# Altium PCB 3KW-139_V1.0PCB.PcbDoc (part 1 of 3)
Units mm, origin at the board's own origin, x right, y up, seen from the top; angles counter-clockwise.
Board outline 181.22 x 106.87 mm, 2 copper layers (Top Layer, Bottom Layer); 320 components, 0 nets, 807 pads, 870 vias.
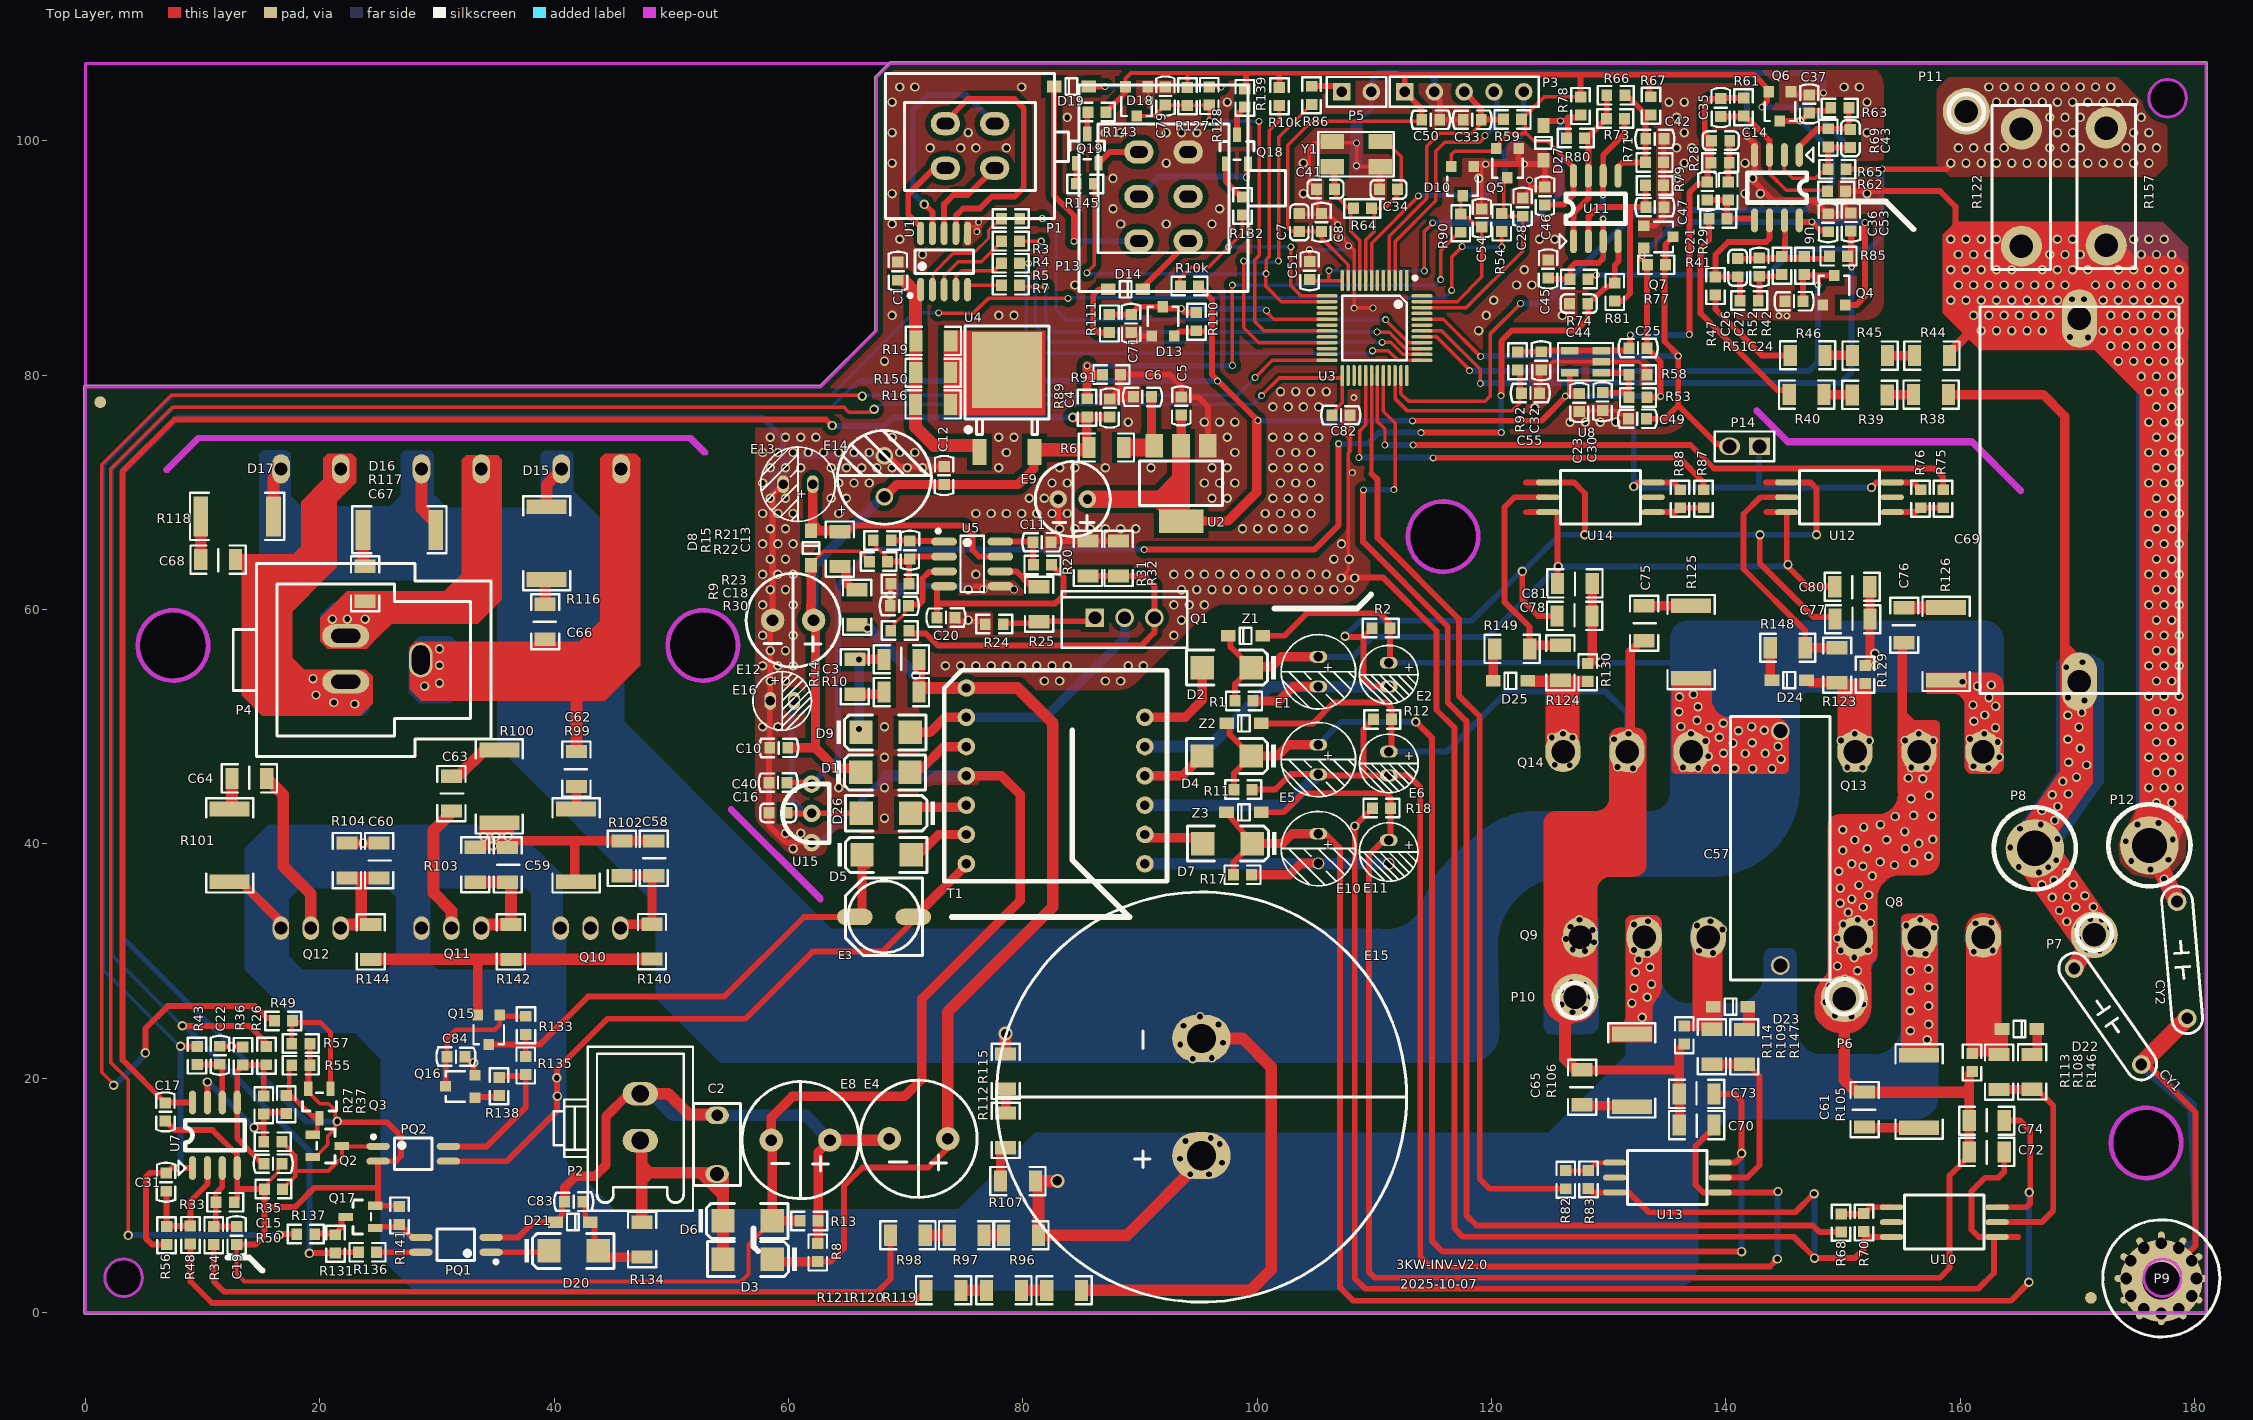
[diagram p0: Top Layer view]
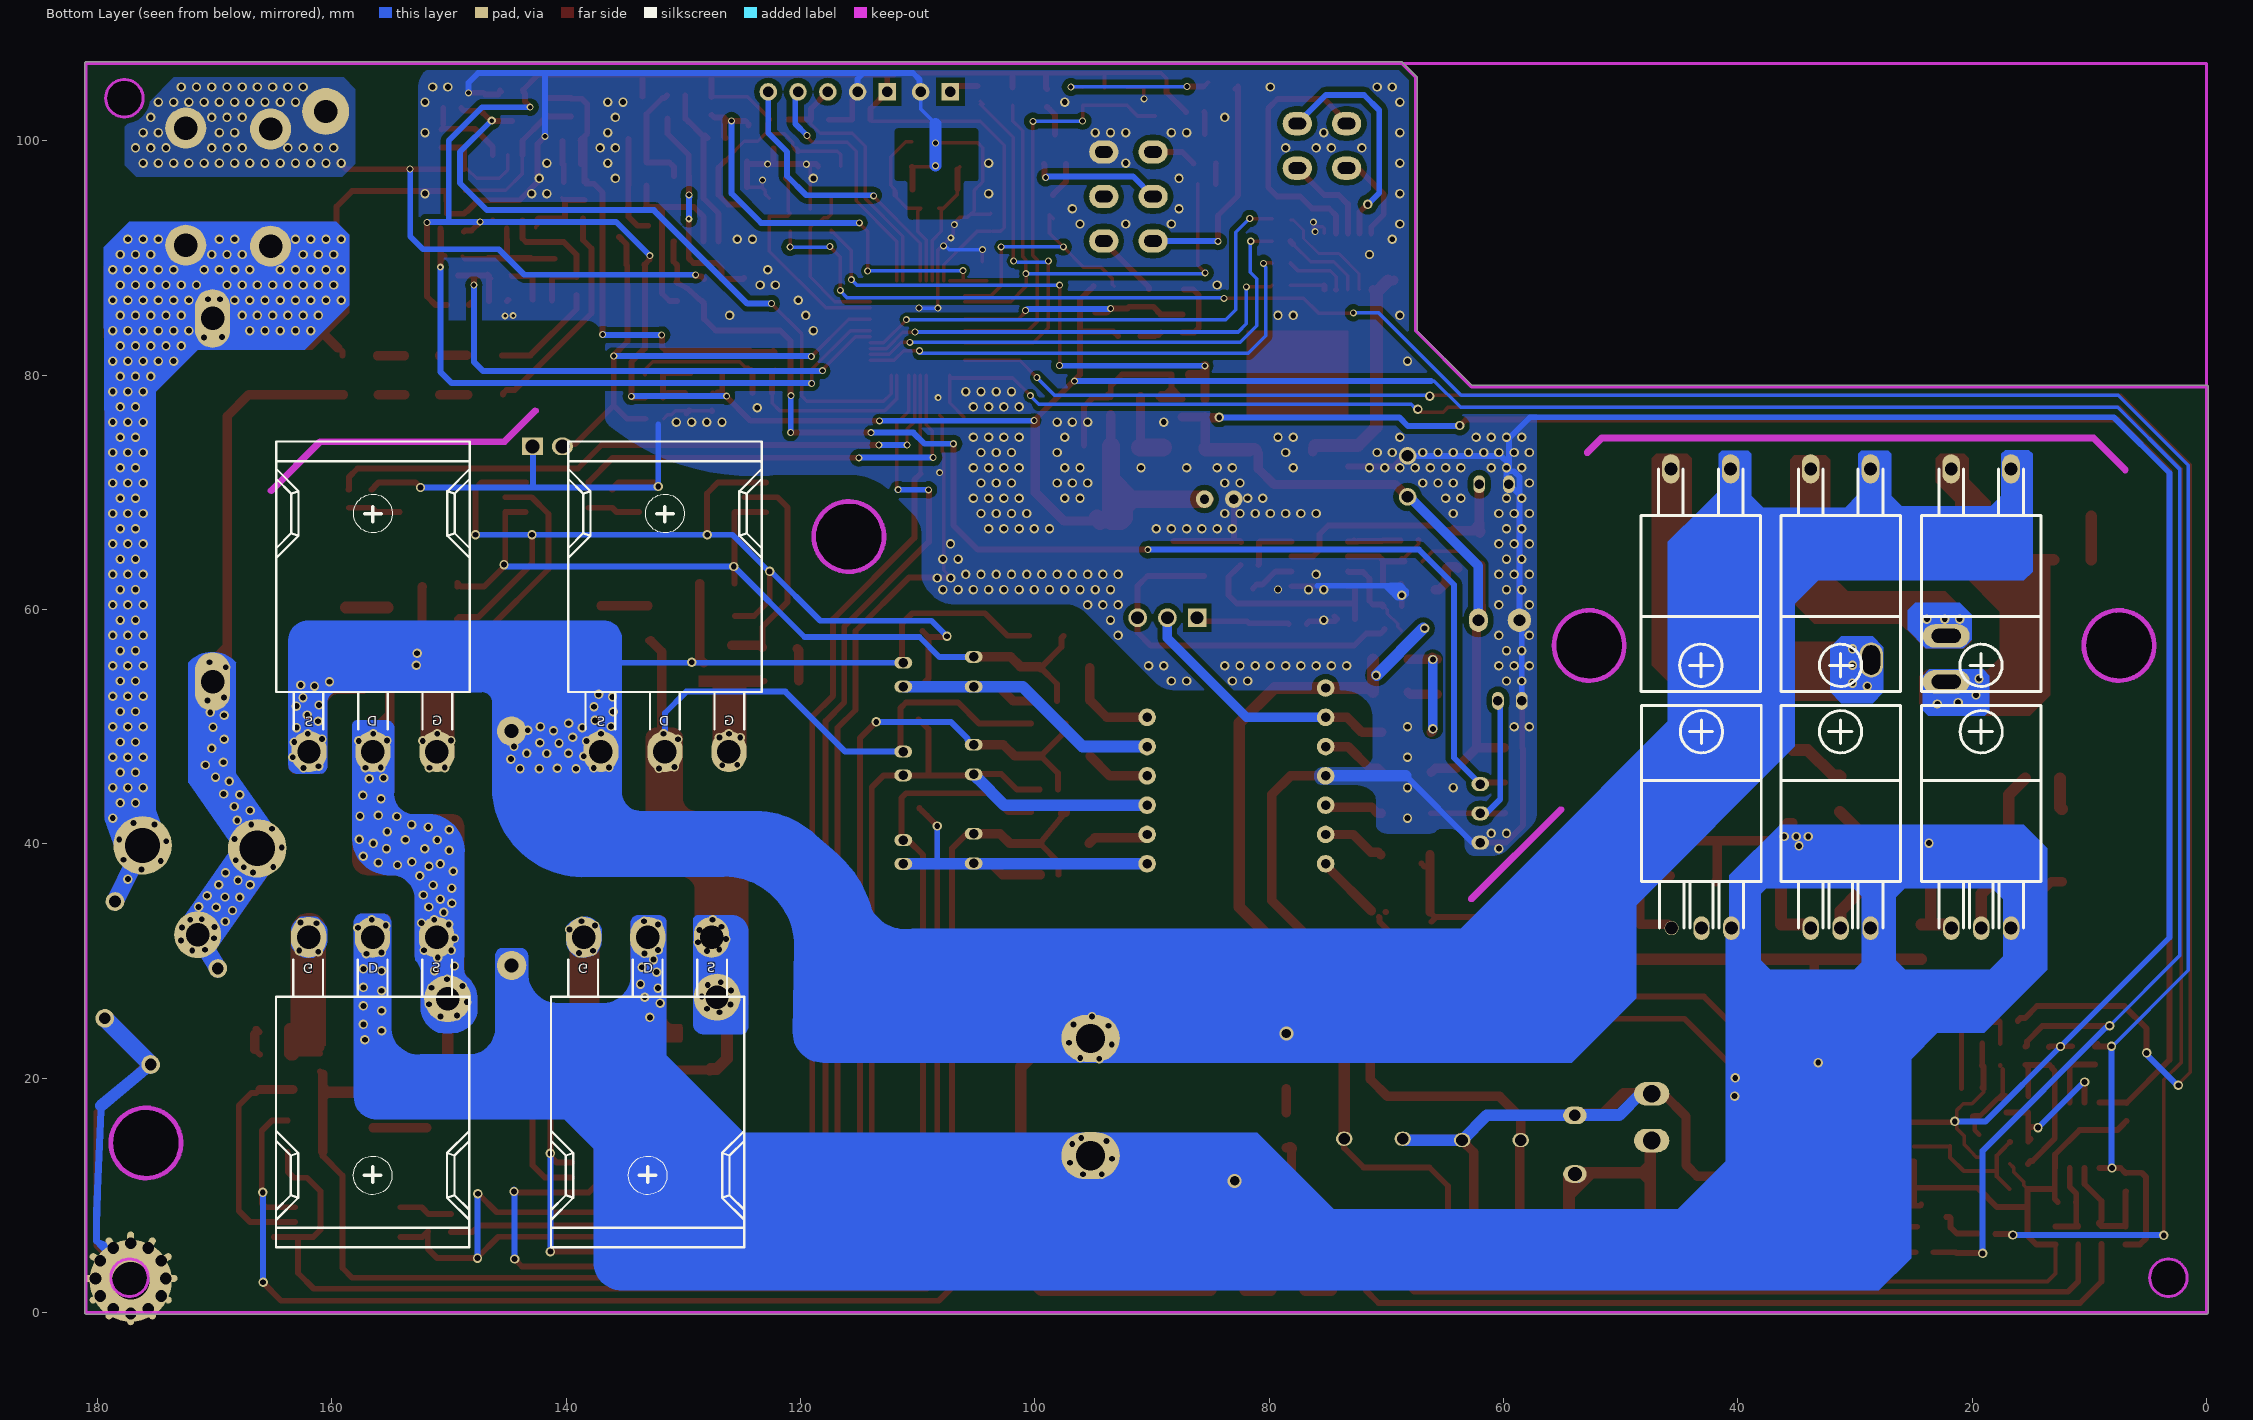
[diagram p1: Bottom Layer view, seen from below]

## Layer stack, top to bottom
Top Solder: solder mask 0.0102, Solder Resist, Dk 3.5
Top Layer: signal copper 0.0356
Dielectric 1: dielectric 0.32, FR-4, Dk 4.8
Bottom Layer: signal copper 0.0356
Bottom Solder: solder mask 0.0102, Solder Resist, Dk 3.5

## Board outline
0,-0.127 cw(c0,0) -0.127,0 -0.127,79.01 cw(c0,79.01) 0.02,79.135 cw(c0.041,79.01) 0.041,79.137 62.699,79.137 67.38,83.819 67.38,105.403 cw(c67.508,105.403) 67.418,105.493 68.632,106.706 68.631,106.706 cw(c68.722,106.616) 68.722,106.744 180.968,106.744 cw(c180.968,106.616) 181.095,106.616 181.095,0.034 cw(c180.968,0.034) 181.086,-0.014 cw(c180.959,0) 180.959,-0.127
cut-out: 7.137,71.75 cw(c6.96,71.927) 6.782,72.105 9.5,74.822 ccw(c9.677,74.645) 9.5,74.822 cw(c9.677,74.645) 9.677,74.895 51.616,74.895 cw(c51.616,74.645) 51.793,74.822 51.792,74.822 cw(c51.616,74.645) 51.793,74.822 51.792,74.822 53.037,73.578 cw(c52.86,73.401) 53.11,73.401 cw(c52.86,73.401) 52.683,73.224 51.512,74.394 9.781,74.394
cut-out: 54.941,42.749 62.561,35.129 ccw(c62.738,35.306) 62.988,35.306 ccw(c62.738,35.306) 62.915,35.483 55.295,43.103 ccw(c55.118,42.926)
cut-out: 176.101,103.637 ccw(c177.701,103.637) 177.701,102.037 ccw(c177.701,103.637) 179.301,103.637 ccw(c177.701,103.637) 177.701,105.237 ccw(c177.701,103.637)
cut-out: 142.455,76.778 145.1,74.132 cw(c145.277,74.31) 145.1,74.133 ccw(c145.277,74.31) 145.277,74.059 160.909,74.059 164.995,69.974 ccw(c165.172,70.151) 165.422,70.151 ccw(c165.172,70.151) 165.349,70.328 161.19,74.487 cw(c161.013,74.31) 161.19,74.487 ccw(c161.013,74.31) 161.013,74.56 145.381,74.56 142.809,77.132 ccw(c142.632,76.955)
cut-out: 112.875,66.226 ccw(c115.875,66.226) 115.875,63.226 ccw(c115.875,66.226) 118.875,66.226 ccw(c115.875,66.226) 115.875,69.226 ccw(c115.875,66.226)
cut-out: 1.667,2.98 ccw(c3.267,2.98) 3.267,1.38 ccw(c3.267,2.98) 4.867,2.98 ccw(c3.267,2.98) 3.267,4.58 ccw(c3.267,2.98)
cut-out: 175.667,2.98 ccw(c177.267,2.98) 177.267,1.38 ccw(c177.267,2.98) 178.867,2.98 ccw(c177.267,2.98) 177.267,4.58 ccw(c177.267,2.98)
cut-out: 172.867,14.48 ccw(c175.867,14.48) 175.867,11.48 ccw(c175.867,14.48) 178.867,14.48 ccw(c175.867,14.48) 175.867,17.48 ccw(c175.867,14.48)
cut-out: 52.705,53.936 cw(c52.705,56.936) 49.705,56.936 cw(c52.705,56.936) 52.705,59.936 cw(c52.705,56.936) 55.705,56.936 cw(c52.705,56.936)
cut-out: 7.485,53.936 cw(c7.485,56.936) 4.485,56.936 cw(c7.485,56.936) 7.485,59.936 cw(c7.485,56.936) 10.485,56.936 cw(c7.485,56.936)

## Design rules (kind name [scope] priority, off if disabled: settings)
Clearance CLR_ICU3_0MM [(IsPad Or IsVia Or IsTrack Or IsArc) And ( InComponent('U1') Or InComponent('U3') Or InComponent('U8') )] p1: gap=0.15 ignorepadtopadclearanceinfootprint=FALSE except(0.3: Arc-Fill Arc-Poly Arc-Region Track-Fill Track-Poly Track-Region SMDPad-Fill SMDPad-Poly SMDPad-Region THPad-Fill THPad-Poly THPad-Region Via-Fill Via-Poly Via-Region Fill-Fill Fill-Poly Fill-Region Poly-Poly Poly-Region Region-Region)
Clearance CLR_ROOM_U3_0P20 [(IsPad Or IsVia Or IsTrack Or IsArc) And WithinRoom('ROOM_U3')] p2: gap=0.2 ignorepadtopadclearanceinfootprint=FALSE except(0.3: Arc-Fill Arc-Poly Arc-Region Track-Fill Track-Poly Track-Region SMDPad-Fill SMDPad-Poly SMDPad-Region THPad-Fill THPad-Poly THPad-Region Via-Fill Via-Poly Via-Region Fill-Fill Fill-Poly Fill-Region Poly-Poly Poly-Region Region-Region)
Clearance [All] p3: gap=0.45 ignorepadtopadclearanceinfootprint=FALSE except(0.5: Arc-Region SMDPad-Region THPad-Region Via-Region Fill-Region Poly-Region Region-Region Region-Text Region-Hole)
ComponentClearance [All] p1: gap=0 collisioncheckmode=3 verticalgap=0 showdistances=FALSE
Height [All] p1: minheight=0 maxheight=35 prefheight=12.7
HoleSize [All] p1: absolutevalues=TRUE maxlimit=10 minlimit=0.025 maxpercent=80.000 minpercent=20.000
HoleToHoleClearance [All] p1 off: gap=0.254 allowstackedmicrovias=TRUE
MinimumSolderMaskSliver [All] p1 off: minsoldermaskwidth=0.254
PlaneConnect [All] p1: planeconnectstyle=Direct reliefexpansion=0.508 reliefentries=4 reliefconductorwidth=0.254 reliefairgap=0.254
PolygonConnect [All] p1: connectstyle=Direct reliefconductorwidth=0.254 reliefentries=4 polygonreliefangle="90 Angle" airgapwidth=0.254
RoomDefinition ROOM_U3 [False] p1: confinementstyle=ConfineIn formatcopy=TRUE lockcomponents=FALSE outline 99.626,95.361 119.332,95.361 119.332,74.94 99.626,74.94
RoutingVias [All] p1: holewidth=0.5 width=0.8 viastyle="Through Hole" minholewidth=0.3 minwidth=0.3 maxholewidth=1 maxwidth=2
SilkToSilkClearance [All] p1 off: silktosilkclearance=0.254
SilkToSolderMaskClearance [IsPad] p1 off: minsilkscreentomaskgap=0.254 clearancetoexposedcopper=TRUE
SolderMaskExpansion [All] p1: expansion=0.102
Width [All] p1: maxlimit=2 minlimit=0.2 preferedwidth=0.254 minimp=50.000000 maximp=50.000000 favimp=50.000000
22 further rules are at their usual default settings.

## Components (designator, comment, footprint, x,y, rotation, side; value= is the part's Value field where it differs from the comment)
C1 "105/25V 20%" 0603C#1 69.35,89.645 r270 top
C2 "CL21X100V104J P5" 104/100V 53.92,14.333 r270 top
C3 "102/1KV 20%" 1206C 71.138,55.753 r180 top
C4 "104/25V 20%" 0603C#1 87.418,77.973 r270 top
C5 "104/25V 20%" 0603C#1 93.531,78.149 r270 top
C6 "105/25V 20%" 0603C#1 89.448,78.151 r0 top
C7 "106/10V/0603" 0603C#2 103.602,93.041 r270 top
C8 "104/25V/0603" 0603C#1 105.496,92.276 r90 top
C10 "104/25V 20%" 0603C#1 59.949,48.195 r180 top
C11 "104/25V 20%" 0603C#1 80.863,65.747 r0 top
C12 "104/25V 20%" 0603C#1 73.289,72.211 r270 top
C13 "471/50V  20%" 0603C#1 70.372,64.299 r90 top
C14 "226" 0603C#2 139.564,100.019 r0 top
C15 "102/25V 10%" 0603C#1 15.257,12.699 r0 top
C16 "104/25V 20%" 0603C#2 59.126,42.648 r0 top
C17 "104/25V 20%" 0603C#1 6.84,17.897 r270 top
C18 "102/25V 10%" 0603C#1 70.236,60.311 r180 top
C19 "103/25V 10%" 0603C#1 12.911,5.8 r90 top
C20 "102/25V 10%" 0603C#1 72.684,59.32 r0 top
C21 "102/25V 10%" 0603C#1 138.427,96.481 r270 top
C22 "102/25V 10%" 0603C#1 11.488,21.192 r90 top
C23 "104/25V 20%" 0603C#1 127.49,76.898 r90 top
C24 "103/25V 10%" 0603C#1 145.054,86.313 r0 top
C25 "226" 0603C#1 131.743,82.313 r0 top
C26 "102/25V 10%" 0603C#2 141.012,89.173 r270 top
C27 "226" 0603C#1 142.866,89.986 r270 top
C28 "103/25V 10%" 0603C#1 122.656,95.108 r270 top
C30 "104/25V 20%" 0603C#1 129.479,78.512 r270 top
C31 "103/25V 10%" 0603C#1 6.891,11.902 r270 top
C32 "226/10V 20%" 0603C#1 124.241,80.459 r90 top
C33 "105/25V 20%" 0603C#1 117.593,101.804 r0 top
C34 "20pF/0603" C0603 111.214,95.856 r0 top
C35 "101/25V 10%" 0603C#1 139.564,102.072 r90 top
C36 "104/25V 20%" 0603C#1 148.721,92.24 r90 top
C37 "103/25V 10%" 0603C#1 147.119,103.919 r270 top
C40 "106/10V 20%" 0603C#1 58.357,45.231 r0 top
C41 "20pF/0603" C0603 105.839,95.883 r0 top
C42 "103/25V 10%" 0603C#1 134.709,100.162 r180 top
C43 "101/25V 10%" 0603C#2 150.627,100.208 r270 top
C44 "104/25V 20%" 0603C#2 127.447,86.107 r180 top
C45 "102/25V 10%" 0603C#1 124.833,89.835 r270 top
C46 "104/25V 20%" 0603C#1 124.561,94.516 r90 top
C47 "103/25V 10%" 0603C#1 133.178,94.346 r0 top
C49 "102/25V 10%" 0603C#1 131.687,76.284 r0 top
C50 "104/25V 20%" 0603C#1 114.049,101.803 r0 top
C51 "102/25V 10%" 0603C#1 104.481,89.69 r270 top
C53 "101/25V 10%" 0603C#1 150.677,93.831 r270 top
C54 "102/25V 10%" 0603C#1 119.182,94.173 r270 top
C55 "101/25V 10%" 0603C#1 124.089,78.478 r180 top
C57 "105/400V" 105/400V-3 144.653,39.624 r270 top
C58 "103/50V 20%" 1206C 48.513,37.276 r90 top
C59 "103/50V 20%" 1206C 36.043,36.724 r90 top
C60 "103/50V 20%" 1206C 25.07,37.088 r90 top
C61 "NC 471/1KV 20%" 1206C 151.841,18.819 r270 top
C62 "102/1KV 20%" 1206C 41.91,47.879 r270 top
C63 "102/1KV 20%" 1206C 31.242,42.799 r90 top
C64 "102/1KV 20%" 1206C 15.494,45.593 r180 top
C65 "NC 471/1KV 20%" 1206C 127.737,20.724 r270 top
C66 "102/1KV 20%" 1206C 39.243,60.452 r270 top
C67 "102/1KV 20%" 1206C 23.876,63.686 r270 top
C68 "102/1KV 20%" 1206C 9.847,64.262 r0 top
C69 "106/250VAC" 106/400V 170.18,69.342 r270 top
C70 "225/50V 20%" 1206C 136.017,16.002 r0 top
C71 "104/25V 20%" 0603C#1 89.241,83.65 r90 top
C72 "225/50V 20%" 1206C 160.782,13.716 r0 top
C73 "225/50V 20%" 1206C 138.997,18.669 r180 top
C74 "225/50V 20%" 1206C 163.762,16.383 r180 top
C75 "NC 471/1KV 20%" 1206C 133.02,57.342 r90 top
C76 "NC 471/1KV 20%" 1206C 155.219,60.153 r270 top
C77 "225/50V 20%" 1206C 152.307,59.179 r180 top
C78 "225/50V 20%" 1206C 128.583,59.459 r180 top
C79 "104/25V 20%" 0603C#1 92.177,104.595 r270 top
C80 "225/50V 20%" 1206C 149.301,61.948 r0 top
C81 "225/50V 20%" 1206C 125.628,62.227 r0 top
C82 "103/25V 10%" 0603C#1 107.916,76.589 r180 top
C83 "105/25V 20%" 0603C#1 40.91,9.469 r0 top
C84 "104/25V 20%" 0603C#1 32.401,21.844 r180 top
CY1 "Y1V400V222M" Y1V400 172.593,25.273 r305 top
CY2 "Y1V400V222M" Y1V400 178.943,30.099 r95 top
D1 "SS1200" "SMA - AK"#1 68.277,46.104 r0 top
D2 "SS1200" "SMA - AK"#1 97.404,55.044 r180 top
D3 "US2M" "SMA - AK"#1 56.519,4.567 r180 top
D4 "SS1200" "SMA - AK"#1 97.396,47.5 r180 top
D5 "SS1200" "SMA - AK"#1 68.382,39.066 r0 top
D6 "US2M" "SMA - AK"#1 56.519,7.831 r0 top
D7 "SS1200" "SMA - AK"#1 97.472,40.032 r180 top
D8 "1N4148" SOD-123F 61.938,65.256 r270 top
D9 "SS1200" "SMA - AK"#1 68.295,49.519 r0 top
D10 "BAV99" SOT-23 117.538,96.568 r180 top
D13 "BAV99" SOT-23 91.965,84.586 r0 top
D14 "1N4148" SOD-123F 88.776,87.329 r180 top
D15 "BYC15-600PQ" "TO-220-AC - S" 43.172,72.009 r180 top locked
D16 "BYC15-600PQ" "TO-220-AC - S" 31.242,72.009 r180 top locked
D17 "BYC15-600PQ" "TO-220-AC - S" 19.253,72.009 r180 top locked
D18 "BAV99" SOT-23 89.719,103.37 r180 top
D19 "1N4148" SOD-123F 84.15,104.636 r0 top
D20 "ES1J" "SMA - AK"#1 41.672,5.27 r0 top
D21 "1N4148" SOD-123F 41.604,7.724 r180 top
D22 "1N4148" SOD-123F 165.047,24.204 r180 top
D23 "1N4148" SOD-123F 140.411,26.109 r180 top
D24 "1N4148" SOD-123F 145.415,53.975 r0 top
D25 "1N4148" SOD-123F 121.615,53.922 r0 top
D26 "SS1200" "SMA - AK"#2 68.573,42.759 r180 top
D27 "1N4148" SOD-123F 124.434,99.831 r270 top
E1 "47uF/35V" ECAP-6.3*11#1 105.228,54.688 r90 top
E2 "22uF/25V" ECAP-5*11#1 111.228,54.445 r270 top
E3 "47uF/35V" E6.60 71.466,30.47 r90 top (schematic designator C25)
E4 "220uF/50V" 10*16 71.108,14.838 r180 top
E5 "47uF/35V" ECAP-6.3*11#1 105.228,47.195 r90 top
E6 "22uF/25V" ECAP-5*11#1 111.239,46.865 r270 top
E8 "220uF/50V" 10*16 61.042,14.721 r180 top
E9 "220uF/16V" 6.3*11 84.271,69.423 r180 top
E10 "47uF/35V" ECAP-6.3*11#2 105.228,39.601 r90 top
E11 "22uF/25V" ECAP-5*11#2 111.228,39.312 r270 top
E12 "220uF/35V" 8*12 60.402,59.092 r180 top
E13 "47uF/35V" ECAP-6.3*11#1 60.813,70.695 r0 top
E14 "220uF/35V" EC08F350 68.193,71.366 r90 top
E15 "2200uF/250V  35*40 南通江海CD293" 1000UF/250V 95.25,18.396 r90 top locked
E16 "22uF/25V" ECAP-5*11#1 59.468,52.206 r0 top
P1 "Header 4" P4-2.8 75.899,99.505 r270 top
P2 "CON2" DJ7021A-2.8-11 47.507,16.273 r0 top
P3 "CON5" HDR1X5 117.675,104.186 r0 top
P4 "CON3" DJ3071A-6.3-11 25.04,55.626 r180 top locked
P5 "" HDR1X2#1 107.206,104.182 r0 top
P6 "CON1" HOLE1.0#1 150.114,26.963 r180 top
P7 "CON1" HOLE1.0#2 171.45,32.394 r0 top
P8 "CON1" HOLE2.5 166.37,39.624 r0 top
P9 "CON1" HOLE 177.165,2.921 r0 top
P10 "CON1" HOLE1.0#3 127.127,26.647 r180 top
P11 "CON1" HOLE1.0#4 160.528,102.489 r0 top
P12 "CON1" HOLE2.5 176.149,39.878 r0 top
P13 "Header 6" P6-2.8 92.016,95.95 r270 top locked
P14 "CON2" HDR1X2#2 142.863,73.922 r180 top
PQ1 "LTV-217-C-G" SOP-4-P1.27 31.632,5.788 r180 top
PQ2 "LTV-217-C-G" SOP-4-P1.27 27.984,13.555 r0 top
Q1 "UF640L" TO-220 88.692,59.305 r0 top
Q2 "S9013" S8050 20.647,14.229 r270 top
Q3 "S9013" S8050 19.982,17.85 r180 top
Q4 "BAV99" SOT-23 149.235,87.249 r0 top
Q5 "BAV99" SOT-23 121.366,98.095 r180 top
Q6 "BAV99" SOT-23 144.613,102.941 r180 top
Q7 "BAV99" SOT-23 134.244,91.804 r270 top
Q8 "CMSG50N60CA" TO-247-1-1 156.515,32.029 r180 top locked
Q9 "CMSG50N60CA" TO-247-1-1 133.045,32.029 r180 top locked
Q10 "JCT616C" "TO-220-AB1 - S"#1 43.114,32.809 r0 top locked
Q11 "JCT616C" "TO-220-AB1 - S"#2 31.242,32.809 r0 top locked
Q12 "JCT616C" "TO-220-AB1 - S"#2 19.243,32.809 r0 top locked
Q13 "CMSG50N60CA" TO-247-1-1 156.489,47.879 r0 top locked
Q14 "CMSG50N60CA" TO-247-1-1 131.572,47.879 r0 top locked
Q15 "S9013" SOT-23 34.426,24.146 r180 top
Q16 "S9013" SOT-23 32.004,19.304 r90 top
Q17 "S9013" S8050 23.48,8.169 r90 top
Q18 "S9013" S8050 98.284,99.281 r0 top
Q19 "S9013" S8050 85.509,99.329 r0 top
R1 "10K 1%" 0603R#1 98.107,52.199 r0 top
R2 "3K 1%" 0603R#1 111.331,58.42 r180 top
R3 "1K 1%" 0603R#1 78.204,93.365 r0 top
R4 "1K 1%" 0603R#1 78.2,91.438 r0 top
R5 "1K 1%" 0603R#1 78.2,89.554 r0 top
R6 "10R 1%" 1206R#1 88.625,73.831 r180 top
R7 "1K 1%" 0603R#1 78.2,87.671 r0 top
R8 "100K 1%" 0603R#2 62.503,5.127 r90 top
R9 "1.5K 1%" 1206R#1 65.861,61.691 r270 top
R10 "10K 1%" 1206R#1 68.158,52.959 r0 top
R10k "10K 1%" 0603R#1 101.911,104.565 r270 top (schematic designator R143)
R10k "10K 1%" 0603R#1 95.004,87.606 r180 top (schematic designator R111)
R11 "10K 1%" 0603R#1 98.04,44.63 r0 top
R12 "3K 1%" 0603R#1 111.458,50.624 r180 top
R13 "100K 1%" 0603R#2 61.772,7.832 r180 top
R14 "10K 1%" 1206R#1 65.669,55.753 r270 top
R15 "1.5K 1%" 1206R#1 64.397,66.649 r270 top
R16 "5.1R 1%" 1206R#1 70.857,77.51 r0 top
R17 "10K 1%" 0603R#1 97.98,37.365 r0 top
R18 "3K 1%" 0603R#1 111.391,43.055 r180 top
R19 "5.1R 1%" 1206R#1 70.882,82.921 r0 top
R20 "10K 1%" 0603R#1 82.453,63.816 r180 top
R21 "30K 1%" 0603R#1 68.78,65.9 r180 top
R22 "10K 1%" 0603R#1 66.927,64.096 r0 top
R23 "3K 1%" 0603R#1 70.287,62.191 r180 top
R24 "10K 1%" 0603R#1 78.339,58.762 r180 top
R25 "100R 1%" 1206R#1 81.396,61.937 r270 top
R26 "3K 1%" 0603R#1 15.451,22.697 r270 top
R27 "5.1M 1%" 0603R#1 15.222,16.941 r90 top
R28 "30K 1%" 0603R#2 139.52,98.151 r180 top
R29 "3K 1%" 0603R#2 140.204,95.725 r270 top
R30 "1K 1%" 0603R#1 68.738,58.204 r0 top
R31 "0.5R 1%" 1206R#1 85.558,62.87 r90 top
R32 "0.5R 1%" 1206R#1 88.174,62.87 r90 top
R33 "4.99K 1%" 0603R#1 12.708,9.423 r180 top
R34 "49.9K 1%" 0603R#1 10.955,5.825 r90 top
R35 "2K 1%" 0603R#1 16.772,14.579 r180 top
R36 "3.3K 1%" 0603R#1 13.444,21.132 r90 top
R37 "10K 1%" 0603R#1 17.153,17.001 r90 top
R38 "200K 1%" 1206R#2 157.514,78.343 r180 top
R39 "100K 1%" 1206R#2 152.29,78.318 r0 top
R40 "100K 1%" 1206R#2 146.896,78.343 r0 top
R41 "1K 1%" 0603R#1 138.571,93.371 r0 top
R42 "1K 1%" 0603R#1 146.701,90.118 r270 top
R43 "1K 1%" 0603R#1 9.533,21.167 r90 top
R44 "200K 1%" 1206R#2 157.59,81.671 r180 top
R45 "100K 1%" 1206R#2 152.307,81.671 r0 top
R46 "100K 1%" 1206R#2 146.981,81.696 r0 top
R47 "1K 1%" 0603R#1 139.115,86.845 r90 top
R48 "49.9K 1%" 0603R#1 8.974,5.851 r90 top
R49 "1K 1%" 0603R#1 17.669,24.892 r180 top
R50 "10K 1%" 0603R#1 15.282,10.54 r0 top
R51 "3K 1%" 0603R#1 141.226,86.369 r0 top
R52 "30K 1%" 0603R#1 144.783,88.578 r90 top
R53 "10K 1%" 0603R#1 131.734,78.098 r0 top
R54 "1K 1%" 0603R#1 120.878,92.263 r90 top
R55 "10K 1%" 0603R#1 19.159,21.107 r180 top
R56 "4.99K 1%" 0603R#1 6.942,5.825 r90 top
R57 "10K 1%" 0603R#1 17.619,22.961 r0 top
R58 "10K 1%" 0603R#1 133.274,80.052 r180 top
R59 "10k 1%" 0603R#1 121.028,101.823 r0 top
R61 "3K 1%" 0603R#2 141.52,102.876 r270 top
R62 "1K 1%" 0603R#1 148.668,95.705 r0 top
R63 "1K 1%" 0603R#1 150.497,102.803 r180 top
R64 "1M/0603" R0603 108.981,94.231 r180 top
R65 "1K 1%" 0603R#1 150.27,97.579 r180 top
R66 "5.1M 1%" 0603R#1 129.843,103.89 r0 top
R67 "18K 1%" 0603R#1 133.612,103.759 r270 top
R68 "330R 1%" 0603R#1 149.835,6.89 r90 top
R69 "3K 1%" 0603R#1 148.745,99.489 r90 top
R70 "2K 1%" 0603R#1 151.79,6.916 r90 top
R71 "2K 1%" 0603R#1 134.683,98.156 r180 top
R73 "5.1M 1%" 0603R#1 129.808,101.904 r0 top
R74 "1K 1%" 0603R#1 126.699,88.2 r0 top
R75 "330R 1%" 0603R#1 158.547,70.228 r270 top
R76 "2K 1%" 0603R#1 156.616,70.228 r270 top
R77 "10K 1%" 0603R#1 133.303,89.426 r0 top
R78 "4.99K 1%" 0603R#1 127.604,102.205 r90 top
R79 "2K 1%" 0603R#1 133.153,96.2 r0 top
R80 "4.99K 1%" 0603R#1 127.955,100.233 r180 top
R81 "18K 1%" 0603R#1 130.516,87.872 r270 top
R82 "330R 1%" 0603R#1 126.34,10.573 r90 top
R83 "2K 1%" 0603R#1 128.27,10.599 r90 top
R85 "5.1K 1%" 0603R#1 148.848,90.158 r0 top
R86 "1K 1%" 0603R#1 104.648,103.115 r90 top
R87 "330R 1%" 0603R#1 138.1,70.228 r270 top
R88 "2K 1%" 0603R#1 136.093,70.228 r270 top
R89 "10K 1%" 0603R#1 85.487,77.987 r270 top
R90 "1K 1%" 0603R#1 117.383,92.2 r90 top
R91 "2K 1%" 0603R#1 86.803,80.054 r0 top
R92 "10K 1%" 0603R#1 122.234,81.973 r270 top
R96 "150K 1%" 1206R#1 78.359,6.604 r0 top
R97 "100K 1%" 1206R#1 73.724,6.604 r0 top
R98 "100K 1%" 1206R#1 68.707,6.604 r0 top
R99 "51R 1%" 2512R 41.885,39.881 r270 top
R100 "51R 1%" 2512R 35.331,44.91 r270 top
R101 "51R 1%" 2512R 12.319,39.878 r270 top
R102 "510R 5%" 1206R#1 45.795,37.276 r90 top
R103 "510R 5%" 1206R#1 33.274,36.733 r90 top
R104 "510R 5%" 1206R#1 22.327,37.088 r90 top
R105 "NC 51R 1%" 2512R 156.489,18.87 r90 top
R106 "NC 51R 1%" 2512R 131.978,20.672 r90 top
R107 "51K 1%" 1206R#2 79.588,11.226 r0 top
R108 "36R 1%" 1206R#1 163.322,19.039 r90 top
R109 "36R 1%" 1206R#1 138.811,21.206 r90 top
R110 "10K 1%" 0603R#1 94.827,85.334 r270 top
R111 "1K 1%" 0603R#1 87.389,83.64 r90 top
R112 "51K 1%" 1206R#1 78.542,17.043 r270 top
R113 "30K 1%" 0603R#1 161.011,20.581 r90 top
R114 "30K 1%" 0603R#1 136.449,22.908 r90 top
R115 "51K 1%" 1206R#1 78.542,22.073 r270 top
R116 "51R 1%" 2512R 39.37,65.659 r270 top
R117 "51R 1%" 2512R 26.797,66.802 r180 top
R118 "51R 1%" 2512R 12.954,67.945 r180 top
R119 "150K 1%" 1206R#1 82.042,1.905 r0 top
R120 "100K 1%" 1206R#1 76.903,1.905 r0 top
R121 "100K 1%" 1206R#1 71.755,1.905 r0 top
R122 "0.01R" "0.01R 5WS 水泥电阻" 165.227,96.012 r270 top
R123 "36R 1%" 1206R#1 149.504,56.741 r270 top
R124 "36R 1%" 1206R#1 125.882,56.952 r270 top
R125 "NC 51R 1%" 2512R 137.033,57.224 r270 top
R126 "NC 51R 1%" 2512R 158.801,57.07 r90 top
R127 "10K 1%" 0603R#1 94.052,103.025 r90 top
R128 "1K 1%" 0603R#1 95.918,104.595 r270 top
R129 "30K 1%" 0603R#1 151.892,55.217 r270 top
R130 "30K 1%" 0603R#1 128.219,55.411 r270 top
R131 "2K 1%" 0603R#1 21.346,6.644 r270 top
R132 "5.1K 1%" 0603R#1 98.754,93.675 r90 top
R133 "1K 1%" 0603R#1 37.601,25.289 r270 top
R134 "5.1K 1%" 1206R#1 47.519,7.718 r270 top
R135 "3K 1%" 0603R#1 37.592,20.32 r90 top
R136 "1K 1%" 0603R#1 24.856,5.158 r180 top
R137 "1K 1%" 0603R#1 18.041,6.697 r0 top
R138 "1K 1%" 0603R#1 35.306,20.082 r270 top
R139 "1K 1%" 0603R#1 98.953,104.432 r270 top
R140 "510R 5%" 1206R#1 48.362,33.151 r270 top
R141 "10k 1%" 0603R#1 26.8,9.058 r270 top
R142 "510R 5%" 1206R#1 36.322,33.126 r270 top
R143 "1K 1%" 0603R#1 85.553,102.454 r0 top
R144 "510R 5%" 1206R#1 24.359,33.126 r270 top
R145 "5.1K 1%" 0603R#1 84.565,96.327 r0 top
R146 "20R 1%" 1206R#2 166.141,20.546 r90 top
R147 "20R 1%" 1206R#2 141.58,22.68 r90 top
R148 "20R 1%" 1206R#2 145.288,56.741 r180 top
R149 "20R 1%" 1206R#2 121.768,56.639 r180 top
R150 "5.1R 1%" 1206R#2 72.355,80.215 r0 top
R157 "0.01R" "0.01R 5WS 水泥电阻" 172.466,96.092 r270 top (schematic designator R122)
T1 "EF16-7+6" EF16-7+7 82.213,45.811 r0 top
U1 "LV8548MC" SOIC-10 73.294,89.697 r0 top
U2 "1117-5" SOT-223 93.5,70.763 r180 top
U3 "BAT32G139 LQFP48" LQFP-48 110.021,84.024 r90 top
U4 "LM317" TO-252(DPAK) 78.655,76.95 r270 top
U5 "UC3845" SOIC-8_150MIL 75.689,63.892 r270 top
U6 "MCP602" SO-8 144.364,96.005 r270 top
U7 "LM358" SO-8 11.057,15.138 r90 top
U8 "LM321" SOT23-5 128.026,81.146 r90 top
U10 "LTV-341P-H" LSOP6 158.648,7.719 r0 top
U11 "LM2903" SO-8 128.901,94.219 r90 top
U12 "LTV-341P-H" LSOP6 149.703,69.583 r180 top
U13 "LTV-341P-H" LSOP6 135.012,11.529 r0 top
U14 "LTV-341P-H" LSOP6 129.301,69.583 r180 top
U15 "CJ79L05/TO-92" "TO-92 - 7915" 61.99,42.607 r90 top
Y1 "8M" YY-1 108.445,98.861 r180 top
Z1 "15V" SOD-123 95.87,58.762 r0 top
Z2 "15V" SOD-123 95.721,51.294 r0 top
Z3 "15V" SOD-123 95.717,43.699 r0 top

## Footprints (in the part's own frame and the unit in brackets; to place one, negate y for a bottom-side part, rotate by r counter-clockwise, add the part's x,y. Pads: shape width x height; smd on the part's side, far side on the other; paste and mask are expansions set on the pad)
"0.01R 5WS 水泥电阻" [mm]
  round 3.5 hole 2: 1(-5,0) 2(5,0)
  silkscreen extent -7,-2.5 7,2.5
6.3*11 [mm]
  round 1.5 hole 0.8: 1(-1.25,0) 2(1.25,0)
  silkscreen extent -3.2,-3.2 3.2,3.2
8*12 [mm]
  round 2 / inner round 2 / far side oval 1.6x2 hole 1: 1(-1.75,0)
  round 2 hole 1: 2(1.75,0)
  silkscreen extent -4,-4 4,4
10*16 [mm]
  round 2 / inner round 2 / far side oval 1.4x1.2 hole 1: 1(-2.5,0) 2(2.5,0)
  silkscreen extent -5,-5 5,5, body extent -5.03,-5.03 5.03,5.03, height 16.53
104/100V [mm]
  oval 1.5x2 hole 1: 1(-2.5,0)
  oval 1.5x2 hole 1.2: 2(2.5,0)
  silkscreen extent -3.5,-2 3.5,2
105/400V-3 [mm]
  round 1.6 / inner round 2.5 / far side round 2.5 hole 1.2: 1(-10,0) 2(10,0)
  silkscreen extent -11.25,-4.25 11.25,4.25
106/400V [mm]
  oval 5x3 hole 2: 1(-15.5,0) 2(15.5,0)
  silkscreen extent -16.5,-8.5 16.5,8.5
0603C#1 [mm]
  rect 0.93x0.98 smd: 1(0,0) 2(1.54,0)
  silkscreen extent -0.89,-0.79 2.43,0.79, body extent -0.03,-0.4 1.57,0.4, height 0.3
0603C#2 [mm]
  rect 0.93x0.98 smd: 1(-0.77,0) 2(0.77,0)
  silkscreen extent -1.53,-0.79 1.54,0.79, body extent -0.8,-0.4 0.8,0.4, height 0.3
0603R#1 [mm]
  rect 0.93x0.98 smd: 1(0,0) 2(1.54,0)
  silkscreen extent -0.76,-0.79 2.3,0.79, body extent -0.08,-0.4 1.62,0.4, height 0.56
0603R#2 [mm]
  rect 0.93x0.98 smd: 1(-0.77,0) 2(0.77,0)
  silkscreen extent -1.53,-0.79 1.54,0.79, body extent -0.85,-0.4 0.85,0.4, height 0.56
1000UF/250V [mm]
  oval 4x5 hole 2.5: 1(-5,0) 2(5,0)
  silkscreen extent -17.5,-17.5 17.5,17.5
1206C [mm]
  rect 1.13x1.8 smd: 1(0,0) 2(2.98,0)
  silkscreen extent -0.87,-1.2 3.84,1.2, body extent -0.1,-0.8 3.1,0.8, height 1
1206R#1 [mm]
  rect 1.13x1.8 smd: 1(0,0) 2(2.98,0)
  silkscreen extent -0.87,-1.2 3.84,1.2, body extent -0.21,-0.86 3.14,0.87, height 0.85
1206R#2 [mm]
  rect 1.13x1.8 smd: 1(-1.49,0) 2(1.49,0)
  silkscreen extent -2.35,-1.2 2.35,1.2, body extent -1.7,-0.86 1.65,0.87, height 0.85
2512R [mm]
  rect 1.25x3.42 smd: 1(-3.1,0) 2(3.1,0)
  silkscreen extent -4.03,-2.01 4.02,2.01, body extent -3.16,-1.6 3.16,1.6, height 0.62
C0603 [mm]
  rect 0.93x0.98 smd: 1(-0.77,0) 2(0.77,0)
  silkscreen extent -1.53,-0.79 1.54,0.79, body extent -0.8,-0.4 0.8,0.4, height 0.3
DJ3071A-6.3-11 [mm]
  oval 2x3 / inner oval 2x4 / far side oval 2x3 hole 1.5 slot 2.5 at 90 deg: 1(-3.585,-0.072)
  oval 4x2 hole 1.2 slot 2.5 at 0 deg: 2(2.815,1.778) 3(2.815,-2.122)
  silkscreen extent -9.58,-8.32 12.41,8.18
DJ7021A-2.8-11 [mm]
  oval 3x2 hole 1.5: 1(-0.143,2.413) 2(-0.143,-1.587)
  silkscreen extent -7.54,-7.59 4.36,6.41
E6.60 [mil]
  oval 55x120 smd: 1(130,228) 2(130,32)
  silkscreen extent 0,0 260,260
EC08F350 [mm]
  round 1.5 hole 1: 1(-1.75,0) 2(1.75,0)
  silkscreen extent -4.09,-4 3.91,4
ECAP-5*11#1 [mil] "直插电解电容，5*11"
  oval 40x60 hole 32: 1(-40,0) 2(40,0)
  silkscreen extent -98,-98 98,98, body extent -98,-98 98,98, height 346
ECAP-5*11#2 [mil] "直插电解电容，5*11"
  oval 40x60 hole 32: 1(-40,0)
  round 40 / inner oval 40x60 / far side oval 40x60 hole 32: 2(40,0)
  silkscreen extent -98,-98 98,98, body extent -98,-98 98,98, height 346
ECAP-6.3*11#1 [mil] "直插电解电容，6.3*11,/6.3*7,P=2.5mm"
  oval 40x60 hole 32: 1(50,0) 2(-50,0)
  silkscreen extent -125,-125 125,125, body extent -125,-125 125,125, height 446
ECAP-6.3*11#2 [mil] "直插电解电容，6.3*11,/6.3*7,P=2.5mm"
  oval 40x60 hole 32: 1(50,0)
  round 40 / inner oval 40x60 / far side oval 40x60 hole 32: 2(-50,0)
  silkscreen extent -125,-125 125,125, body extent -125,-125 125,125, height 446
EF16-7+7 [mm]
  round 1.5 hole 0.8: 1(-7.029,7.496) 2(-7.029,4.996) 3(-7.029,2.496) 4(-7.029,-0.004) 5(-7.029,-2.504) 6(-7.029,-5.004) 7(-7.029,-7.504) 8(8.211,-7.504) 9(8.211,-5.004) 10(8.211,-2.504) 11(8.211,-0.004) 12(8.211,2.496) 13(8.211,4.996)
  round 1.5 on Top Overlay: 14(8.211,7.496)
  silkscreen extent -8.91,-9 10.09,9
HDR1X2#1 [mm] "Connector; Header; 2 Position"
  rect 1.5x1.5 hole 0.9: 1(0,0)
  round 1.5 hole 0.9: 2(2.54,0)
  silkscreen extent -1.27,-1.27 3.81,1.27, body extent -1.27,-1.27 3.81,1.27, height 8
HDR1X2#2 [mm] "Connector; Header; 2 Position"
  rect 1.8x1.5 hole 1.2: 1(0,0)
  oval 1.8x1.5 hole 1.2: 2(2.54,0)
  silkscreen extent -1.27,-1.27 3.81,1.27, body extent -1.27,-1.27 3.81,1.27, height 8
HDR1X5 [mm]
  rect 1.5x1.5 hole 0.9: 1(-5.08,0)
  round 1.5 hole 0.9: 2(-2.54,0) 3(0,0) 4(2.54,0) 5(5.08,0)
  silkscreen extent -6.35,-1.27 6.35,1.27
HOLE [mm]
  oval 2x0.6 hole 1: 1(-3,0) 1(3,0)
  oval 2x0.6 hole 1 rot 30: 1(-2.598,-1.5) 1(2.598,1.5)
  oval 2x0.6 hole 1 rot 150: 1(-2.598,1.5) 1(2.598,-1.5)
  oval 2x0.6 hole 1 rot 60: 1(-1.5,-2.598) 1(1.5,2.598)
  oval 2x0.6 hole 1 rot 120: 1(-1.5,2.598) 1(1.5,-2.598)
  oval 0.6x2 hole 1: 1(0,-3) 1(0,3)
  round 7 hole 3.2: 1(0,-0.2)
  silkscreen extent -5,-5 5,5
HOLE1.0#1 [mm]
  round 4 hole 2: 1(0,0.166)
  silkscreen extent -1.5,-1.5 1.5,1.5
HOLE1.0#2 [mm]
  round 4 hole 2: 1(0,-0.136)
  silkscreen extent -1.5,-1.5 1.5,1.5
HOLE1.0#3 [mm]
  round 4 hole 2: 1(0,-0.277)
  silkscreen extent -1.5,-1.5 1.5,1.5
HOLE1.0#4 [mm]
  round 4 hole 2: 1(0,0.017)
  silkscreen extent -1.5,-1.5 1.5,1.5
HOLE2.5 [mm]
  round 5 hole 3: 1(0,0)
  silkscreen extent -3.5,-3.5 3.5,3.5
LQFP-48 [mm]
  rect 1.8x0.3 smd mask+0.051: 1(4.05,-2.75)
  oval 1.8x0.3 smd mask+0.051: 2(4.05,-2.25) 3(4.05,-1.75) 4(4.05,-1.25) 5(4.05,-0.75) 6(4.05,-0.25) 7(4.05,0.25) 8(4.05,0.75) 9(4.05,1.25) 10(4.05,1.75) 11(4.05,2.25) 12(4.05,2.75) 25(-4.05,2.75) 26(-4.05,2.25) 27(-4.05,1.75) 28(-4.05,1.25) 29(-4.05,0.75) 30(-4.05,0.25) 31(-4.05,-0.25) 32(-4.05,-0.75) 33(-4.05,-1.25) 34(-4.05,-1.75) 35(-4.05,-2.25) 36(-4.05,-2.75)
  oval 0.3x1.8 smd mask+0.051: 13(2.75,4.05) 14(2.25,4.05) 15(1.75,4.05) 16(1.25,4.05) 17(0.75,4.05) 18(0.25,4.05) 19(-0.25,4.05) 20(-0.75,4.05) 21(-1.25,4.05) 22(-1.75,4.05) 23(-2.25,4.05) 24(-2.75,4.05) 37(-2.75,-4.05) 38(-2.25,-4.05) 39(-1.75,-4.05) 40(-1.25,-4.05) 41(-0.75,-4.05) 42(-0.25,-4.05) 43(0.25,-4.05) 44(0.75,-4.05) 45(1.25,-4.05) 46(1.75,-4.05) 47(2.25,-4.05) 48(2.75,-4.05)
  silkscreen extent -2.75,-3.6 4.42,2.75, body extent -4.5,-4.5 4.5,4.5, height 1.6
LSOP6 [mm]
  oval 2x0.5 smd: 1(-4.5,1.27) 2(-4.5,0) 3(-4.5,-1.27) 4(4.5,-1.27) 5(4.5,0) 6(4.5,1.27)
  round 1 on Top Overlay: 10(-2.5,1.4) 11(-4.1,2.8)
  silkscreen extent -3.4,-2.3 3.4,2.3
P4-2.8 [mm]
  oval 2x2.5 hole 1 slot 1.5 at 90 deg: 1(-1.968,1.707) 2(-1.968,-2.493) 3(1.832,1.707) 4(1.832,-2.493)
  silkscreen extent -6.25,-7.59 6.13,8, body extent -2.47,-2.79 2.33,2.01, height 29.5
P6-2.8 [mm]
  oval 2x2.5 hole 1 slot 1.5 at 90 deg: 1(-3.1,2.1) 2(-3.1,-2.1) 3(0.7,2.1) 4(0.7,-2.1) 5(4.5,2.1) 6(4.5,-2.1)
  silkscreen extent -8.8,-7.2 8.8,10.4, body extent -3.6,-2.4 5,2.4, height 17.5
R0603 [mm]
  rect 0.93x0.98 smd: 1(-0.77,0) 2(0.77,0)
  silkscreen extent -1.53,-0.79 1.54,0.79
S8050 [mm] "SOT-23"
  rect 0.7x1.25 smd: 1(-0.95,-1.25) 2(0.95,-1.25) 3(0,1.25)
  silkscreen extent -1.46,-0.9 1.46,0.65
"SMA - AK"#1 [mm] "SMA(DO-214AC)"
  rect 2x2 smd: A(2.1,0) K(-2.1,0)
  silkscreen extent -4.2,-1.5 3.43,1.5, body extent -2.6,-1.3 2.6,1.3, height 2.4
"SMA - AK"#2 [mm]
  rect 2x2 smd: A(2.35,0.139) K(-1.85,0.139)
  silkscreen extent -3.95,-1.36 3.68,1.64, body extent -2.35,-1.16 2.85,1.44, height 2.4
SO-8 [mil]
  oval 80x24 smd: 1(-110,75) 2(-110,25) 3(-110,-25) 4(-110,-75) 5(110,-75) 6(110,-25) 7(110,25) 8(110,75)
  silkscreen extent -134,-100 50,122
SOD-123 [mm]
  rect 1.25x1 smd: A(4.625,-1) K(1.675,-1)
  silkscreen extent 2.65,-1.7 3.65,-0.3
SOD-123F [mm]
  rect 1.25x1 smd: A(1.475,0) K(-1.475,0)
  silkscreen extent -0.5,-0.7 0.5,0.7, body extent -1.9,-0.85 1.85,0.85, height 1.2
SOIC-8_150MIL [mm]
  oval 0.7x2.2 smd: 1(-1.905,-2.4) 2(-0.635,-2.4) 3(0.635,-2.4) 4(1.905,-2.4) 5(1.905,2.4) 6(0.635,2.4) 7(-0.635,2.4) 8(-1.905,2.4)
  silkscreen extent -2.95,-3.05 2.4,1
SOIC-10 [mm]
  oval 0.6x2 smd: 1(-2,-2.4) 2(-1,-2.4) 3(0,-2.4) 4(1,-2.4) 5(2,-2.4) 6(2,2.4) 7(1,2.4) 8(0,2.4) 9(-1,2.4) 10(-2,2.4)
  silkscreen extent -3.05,-3.05 2.5,1, body extent -2.3,-3.1 2.3,3.1, height 0.3
SOP-4-P1.27 [mm]
  oval 2x0.6 smd: 1(-3,0.635) 2(-3,-0.635) 3(3,-0.635) 4(3,0.635)
  silkscreen extent -3.55,-1.35 1.6,1.6
SOT23-5 [mm]
  rect 0.65x1.5 smd: 1(-0.95,-1.35) 2(0,-1.35) 3(0.95,-1.35) 4(0.95,1.35) 5(-0.95,1.35)
  silkscreen extent -1.6,-2.35 1.6,2.35
SOT-23 [mm] "SOT-23; 3 Leads; Body 3.0 x 2.6 mm, inc. leads (LxW max)"
  rect 0.9x0.95 smd: 1(-0.95,-1.25) 2(0.95,-1.25) 3(0,1.25)
  silkscreen extent -1.3,-0.38 1.3,1.25
SOT-223 [mil]
  rect 59x79 smd: 1(-90.8,-127.18) 2(-0.25,-127.18) 3(90.2,-127.18)
  rect 150x79 smd: 2(-0.92,126.36)
  silkscreen extent -140,-75 140,75
"TO-92 - 7915" [mm]
  round 1.5 / inner round 1.5 / far side oval 1.2x1.5 hole 0.8: 1(-2.5,0) 2(0,0) 3(2.5,0)
  silkscreen extent -2.5,-1.5 2.5,2.5
TO-220 [mm] "TO, Thru-Hole, Vertical, Heatsink Mounted; 3 In-Line Leads; Pitch 2.54 mm"
  rect 1.6x1.6 hole 1.1: 1(-2.54,0)
  round 1.6 hole 1.1: 2(0,0) 3(2.54,0)
  silkscreen extent -5.35,-2.55 5.35,2.25
"TO-220-AB1 - S"#1 [mm]
  oval 1.4x2 hole 1.1: A(0,0) K(-2.55,0)
  oval 1.4x2 / inner oval 1.4x2 / far side round 1.2 hole 1.1: G(2.55,0)
"TO-220-AB1 - S"#2 [mm]
  oval 1.4x2 hole 1.1: A(0,0) G(2.55,0) K(-2.55,0)
"TO-220-AC - S" [mm]
  oval 1.5x2.5 hole 1.1: 1(2.55,0) 2(-2.55,0)
TO-247-1-1 [mm]
  oval 3x3.5 hole 2: D(0,0) G(-5.461,0) S(5.461,0)
TO-252(DPAK) [mm]
  rect 2.2x1.2 smd: 1(3.5,-2.361) 3(3.496,2.361)
  rect 6.5x6 smd: 2(-3.5,0)
  silkscreen extent -7.25,-3.57 2,3.57
Y1V400 [mm]
  round 1.6 hole 1: 1(5,0) 2(-5,0)
  silkscreen extent -6.31,-1.31 6.31,1.31, body extent -4,-1.1 4,1.28, height 9.55
YY-1 [mm]
  rect 2x1.3 smd: 1(-2.05,-1.076) 2(2.05,-1.076) 3(2.05,1.076) 4(-2.05,1.076)
  silkscreen extent -3.21,-1.9 3.21,1.9

## Part data
C1 C3 C4 C5 C6 C7 C8 C10 C11 C12 C13 C14 C15 C16 C17 C18 C19 C20 C21 C22 C23 C24 C25 C26 C27 C28 C30 C31 C32 C33 C35 C36 C37 C40 C42 C43 C44 C45 C46 C47 C49 C50 C51 C53 C54 C55 C58 C59 C60 C61 C62 C63 C64 C65 C66 C67 C68 C70 C71 C72 C73 C74 C75 C76 C77 C78 C79 C80 C81 C82 C83 C84 CY1 CY2: library part C_SMD, "贴片 无极性电容"
C2 C57 C69: library part CAPACITOR_CBB, "CBB无极性电容"
C34 C41: library part CAP-SMD, "Cap"
D1 D2 D3 D4 D5 D6 D7 D8 D9 D14 D19 D20 D21 D22 D23 D24 D25 D26 D27: library part D_SMD, "贴片 二极管"
D10 D13 D18: library part D2-串联, "贴片串联双二极管 eg:BAT54S"
D15 D16 D17: library part "DIODE TO-220"
E1 E2 E4 E5 E6 E8 E9 E10 E11 E12 E13 E14 E15 E16: library part E, "直插 电解电容"
E3: library part ELECTRO1, "Electrolytic Capacitor"
P1: "Header, 4-Pin", LatestRevisionDate=17-Jul-2002, LatestRevisionNote="Re-released for DXP Platform.", Publisher="Altium Limited"
P3: library part "Header 5", "Header, 5-Pin", LatestRevisionDate=17-Jul-2002, LatestRevisionNote="Re-released for DXP Platform.", Publisher="Altium Limited"
P5: library part CON2P, "Connector, 2Pin"
P13: "Header, 5-Pin", LatestRevisionDate=17-Jul-2002, LatestRevisionNote="Re-released for DXP Platform.", Publisher="Altium Limited"
PQ1 PQ2: library part OPTO-817, "光藕-PC817,PC357"
Q1: library part MOS-N, "MOSFET"
Q2 Q3 Q15 Q16 Q17 Q18 Q19: library part S8050, "NPN"
Q8 Q9 Q13 Q14: library part IGBT
Q10 Q11 Q12: library part TYN625
R1 R2 R3 R4 R5 R6 R7 R8 R9 R10 R10k R10k R11 R12 R13 R14 R15 R16 R17 R18 R19 R20 R21 R22 R23 R24 R25 R26 R27 R28 R29 R30 R31 R32 R33 R34 R35 R36 R37 R38 R39 R40 R41 R42 R43 R44 R45 R46 R47 R48 R49 R50 R51 R52 R53 R54 R55 R56 R57 R58 R59 R61 R62 R63 R65 R66 R67 R68 R69 R70 R71 R73 R74 R75 R76 R77 R78 R79 R80 R81 R82 R83 R85 R86 R87 R88 R89 R90 R91 R92 R96 R97 R98 R99 R100 R101 R102 R103 R104 R105 R106 R107 R108 R109 R110 R111 R112 R113 R114 R115 R116 R117 R118 R119 R120 R121 R122 R123 R124 R125 R126 R127 R128 R129 R130 R131 R132 R133 R134 R135 R136 R137 R138 R139 R140 R141 R142 R143 R144 R145 R146 R147 R148 R149 R150 R157: library part R_SMD, "贴片 电阻器"
R64: library part RES-SMD, "SMD"
U2: library part 1117, "IC-1117系列稳压块"
U3: library part CMS32M5333&CMS32M5333L
U5: library part LM3845
U6 U11: library part LM358, "AMP 0.3V/uS"
U7: "AMP 0.3V/uS"
U15: library part LM7905
Y1: library part CRYSTAL_1
Z1 Z2 Z3: library part ZD_SMD, "贴片 稳压二极管"

## Free pads (board coordinates)
  round 1.5 hole 2: 13(41.108,-3)
  round 1 smd mask+0.3: 25(1.275,77.705) 25(171.159,1.26)

## Via types
v1: diameter 0.8, hole 0.5, Top Layer to Bottom Layer, 773 vias
v2: diameter 0.6, hole 0.4, Top Layer to Bottom Layer, 86 vias
v3: diameter 0.6, hole 0.3, Top Layer to Bottom Layer, 6 vias
v4: diameter 1.2, hole 0.8, Top Layer to Bottom Layer, 2 vias
v5: diameter 0.7/0.7 (per signal layer), hole 0.5, Top Layer to Bottom Layer, 1 vias
v6: diameter 0.7/0.8 (per signal layer), hole 0.5, Top Layer to Bottom Layer, 1 vias
v7: diameter 0.7, hole 0.4, Top Layer to Bottom Layer, 1 vias

## Nets (pads, with @x,y where several pads share a name; then routed paths per layer and width w, separated by ;. In a path a pad name is that pad's centre, name@x,y a point inside that pad or via, vN(x,y) a via of type N, cw(c..) or ccw(c..) an arc to the next point about the centre after c; other vN are vias at no path point)
pads on no net: C1.1 C1.2 C2.1 C2.2 C3.1 C3.2 C4.1 C4.2 C5.1 C5.2 C6.1 C6.2 C7.1 C7.2 C8.1 C8.2 C10.1 C10.2 C11.1 C11.2 C12.1 C12.2 C13.1 C13.2 C14.1 C14.2 C15.1 C15.2 C16.1 C16.2 C17.1 C17.2 C18.1 C18.2 C19.1 C19.2 C20.1 C20.2 C21.1 C21.2 C22.1 C22.2 C23.1 C23.2 C24.1 C24.2 C25.1 C25.2 C26.1 C26.2 C27.1 C27.2 C28.1 C28.2 C30.1 C30.2 C31.1 C31.2 C32.1 C32.2 C33.1 C33.2 C34.1 C34.2 C35.1 C35.2 C36.1 C36.2 C37.1 C37.2 C40.1 C40.2 C41.1 C41.2 C42.1 C42.2 C43.1 C43.2 C44.1 C44.2 C45.1 C45.2 C46.1 C46.2 C47.1 C47.2 C49.1 C49.2 C50.1 C50.2 C51.1 C51.2 C53.1 C53.2 C54.1 C54.2 C55.1 C55.2 C57.1 C57.2 C58.1 C58.2 C59.1 C59.2 C60.1 C60.2 C61.1 C61.2 C62.1 C62.2 C63.1 C63.2 C64.1 C64.2 C65.1 C65.2 C66.1 C66.2 C67.1 C67.2 C68.1 C68.2 C69.1 C69.2 C70.1 C70.2 C71.1 C71.2 C72.1 C72.2 C73.1 C73.2 C74.1 C74.2 C75.1 C75.2 C76.1 C76.2 C77.1 C77.2 C78.1 C78.2 C79.1 C79.2 C80.1 C80.2 C81.1 C81.2 C82.1 C82.2 C83.1 C83.2 C84.1 C84.2 CY1.1 CY1.2 CY2.1 CY2.2 D1.A D1.K D2.A D2.K D3.A D3.K D4.A D4.K D5.A D5.K D6.A D6.K D7.A D7.K D8.A D8.K D9.A D9.K D10.1 D10.2 D10.3 D13.1 D13.2 D13.3 D14.A D14.K D15.1 D15.2 D16.1 D16.2 D17.1 D17.2 D18.1 D18.2 D18.3 D19.A D19.K D20.A D20.K D21.A D21.K D22.A D22.K D23.A D23.K D24.A D24.K D25.A D25.K D26.A D26.K D27.A D27.K E1.1 E1.2 E2.1 E2.2 E3.1 E3.2 E4.1 E4.2 E5.1 E5.2 E6.1 E6.2 E8.1 E8.2 E9.1 E9.2 E10.1 E10.2 E11.1 E11.2 E12.1 E12.2 E13.1 E13.2 E14.1 E14.2 E15.1 E15.2 E16.1 E16.2 P1.1 P1.2 P1.3 P1.4 P2.1 P2.2 P3.1 P3.2 P3.3 P3.4 P3.5 P4.1 P4.2 P4.3 P5.1 P5.2 P6.1 P7.1 P8.1 P9.1 P10.1 P11.1 P12.1 P13.1 P13.2 P13.3 P13.4 P13.5 P13.6 P14.1 P14.2 PQ1.1 PQ1.2 PQ1.3 PQ1.4 PQ2.1 PQ2.2 PQ2.3 PQ2.4 Q1.1 Q1.2 Q1.3 Q2.1 Q2.2 Q2.3 Q3.1 Q3.2 Q3.3 Q4.1 Q4.2 Q4.3 Q5.1 Q5.2 Q5.3 Q6.1 Q6.2 Q6.3 Q7.1 Q7.2 Q7.3 Q8.D Q8.G Q8.S Q9.D Q9.G Q9.S Q10.A Q10.G Q10.K Q11.A Q11.G Q11.K Q12.A Q12.G Q12.K Q13.D Q13.G Q13.S Q14.D Q14.G Q14.S Q15.1 Q15.2 Q15.3 Q16.1 Q16.2 Q16.3 Q17.1 Q17.2 Q17.3 Q18.1 Q18.2 Q18.3 Q19.1 Q19.2 Q19.3 R1.1 R1.2 R2.1 R2.2 R3.1 R3.2 R4.1 R4.2 R5.1 R5.2 R6.1 R6.2 R7.1 R7.2 R8.1 R8.2 R9.1 R9.2 R10.1 R10.2 R10k.1 R10k.2 R11.1 R11.2 R12.1 R12.2 R13.1 R13.2 R14.1 R14.2 R15.1 R15.2 R16.1 R16.2 R17.1 R17.2 R18.1 R18.2 R19.1 R19.2 R20.1 R20.2 R21.1 R21.2 R22.1 R22.2 R23.1 R23.2 R24.1 R24.2 R25.1 R25.2 R26.1 R26.2 R27.1 R27.2 R28.1 R28.2 R29.1 R29.2 R30.1 R30.2 R31.1 R31.2 R32.1 R32.2 R33.1 R33.2 R34.1 R34.2 R35.1 R35.2 R36.1 R36.2 R37.1 R37.2 R38.1 R38.2 R39.1 R39.2 R40.1 R40.2 R41.1 R41.2 R42.1 R42.2 R43.1 R43.2 R44.1 R44.2 R45.1 R45.2 R46.1 R46.2 R47.1 R47.2 R48.1 R48.2 R49.1 R49.2 R50.1 R50.2 R51.1 R51.2 R52.1 R52.2 R53.1 R53.2 R54.1 R54.2 R55.1 R55.2 R56.1 R56.2 R57.1 R57.2 R58.1 R58.2 R59.1 R59.2 R61.1 R61.2 R62.1 R62.2 R63.1 R63.2 R64.1 R64.2 R65.1 R65.2 R66.1 R66.2 R67.1 R67.2 R68.1 R68.2 R69.1 R69.2 R70.1 R70.2 R71.1 R71.2 R73.1 R73.2 R74.1 R74.2 R75.1 R75.2 R76.1 R76.2 R77.1 R77.2 R78.1 R78.2 R79.1 R79.2 R80.1 R80.2 R81.1 R81.2 R82.1 R82.2 R83.1 R83.2 R85.1 R85.2 R86.1 R86.2 R87.1 R87.2 R88.1 R88.2 R89.1 R89.2 R90.1 R90.2 R91.1 R91.2 R92.1 R92.2 R96.1 R96.2 R97.1 R97.2 R98.1 R98.2 R99.1 R99.2 R100.1 R100.2 R101.1 R101.2 R102.1 R102.2 R103.1 R103.2 R104.1 R104.2 R105.1 R105.2 R106.1 R106.2 R107.1 R107.2 R108.1 R108.2 R109.1 R109.2 R110.1 R110.2 R111.1 R111.2 R112.1 R112.2 R113.1 R113.2 R114.1 R114.2 R115.1 R115.2 R116.1 R116.2 R117.1 R117.2 R118.1 R118.2 R119.1 R119.2 R120.1 R120.2 R121.1 R121.2 R122.1 R122.2 R123.1 R123.2 R124.1 R124.2 R125.1 R125.2 R126.1 R126.2 R127.1 R127.2 R128.1 R128.2 R129.1 R129.2 R130.1 R130.2 R131.1 R131.2 R132.1 R132.2 R133.1 R133.2 R134.1 R134.2 R135.1 R135.2 R136.1 R136.2 R137.1 R137.2 R138.1 R138.2 R139.1 R139.2 R140.1 R140.2 R141.1 R141.2 R142.1 R142.2 R143.1 R143.2 R144.1 R144.2 R145.1 R145.2 R146.1 R146.2 R147.1 R147.2 R148.1 R148.2 R149.1 R149.2 R150.1 R150.2 R157.1 R157.2 T1.1 T1.2 T1.3 T1.4 T1.5 T1.6 T1.7 T1.8 T1.9 T1.10 T1.11 T1.12 T1.13 T1.14 U1.1 U1.2 U1.3 U1.4 U1.5 U1.6 U1.7 U1.8 U1.9 U1.10 U2.1 U2.2 U2.3 U3.1 U3.2 U3.3 U3.4 U3.5 U3.6 U3.7 U3.8 U3.9 U3.10 U3.11 U3.12 U3.13 U3.14 U3.15 U3.16 U3.17 U3.18 U3.19 U3.20 U3.21 U3.22 U3.23 U3.24 U3.25 U3.26 U3.27 U3.28 U3.29 U3.30 U3.31 U3.32 U3.33 U3.34 U3.35 U3.36 U3.37 U3.38 U3.39 U3.40 U3.41 U3.42 U3.43 U3.44 U3.45 U3.46 U3.47 U3.48 U4.1 U4.2 U4.3 U5.1 U5.2 U5.3 U5.4 U5.5 U5.6 U5.7 U5.8 U6.1 U6.2 U6.3 U6.4 U6.5 U6.6 U6.7 U6.8 U7.1 U7.2 U7.3 U7.4 U7.5 U7.6 U7.7 U7.8 U8.1 U8.2 U8.3 U8.4 U8.5 U10.1 U10.2 U10.3 U10.4 U10.5 U10.6 U10.10 U10.11 U11.1 U11.2 U11.3 U11.4 U11.5 U11.6 U11.7 U11.8 U12.1 U12.2 U12.3 U12.4 U12.5 U12.6 U12.10 U12.11 U13.1 U13.2 U13.3 U13.4 U13.5 U13.6 U13.10 U13.11 U14.1 U14.2 U14.3 U14.4 U14.5 U14.6 U14.10 U14.11 U15.1 U15.2 U15.3 Y1.1 Y1.2 Y1.3 Y1.4 Z1.A Z1.K Z2.A Z2.K Z3.A Z3.K